# Altium PCB Main.PcbDoc
Units mil, origin at the board's own origin, x right, y up, seen from the top; angles counter-clockwise.
Board outline 2100 x 1125 mil, 3 copper layers (Top Layer, GND, Bottom Layer), stack 36.8 mil thick; 34 components, 21 nets, 135 pads, 0 vias.
Unrouted connection lines stored in the file: 80.
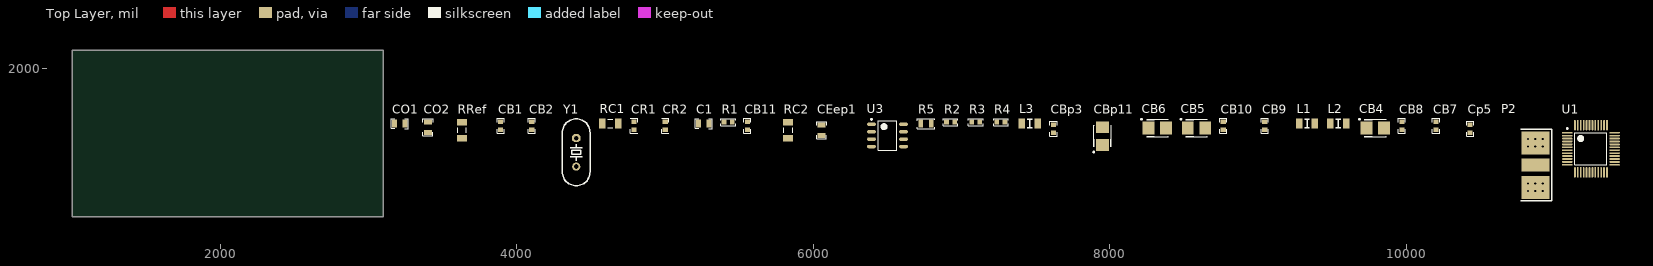
[diagram p0: Top Layer view]
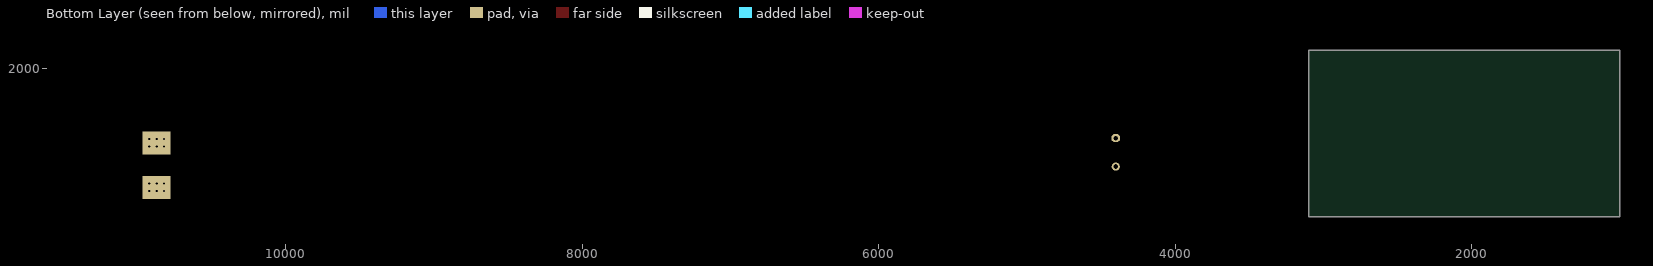
[diagram p1: Bottom Layer view, seen from below]
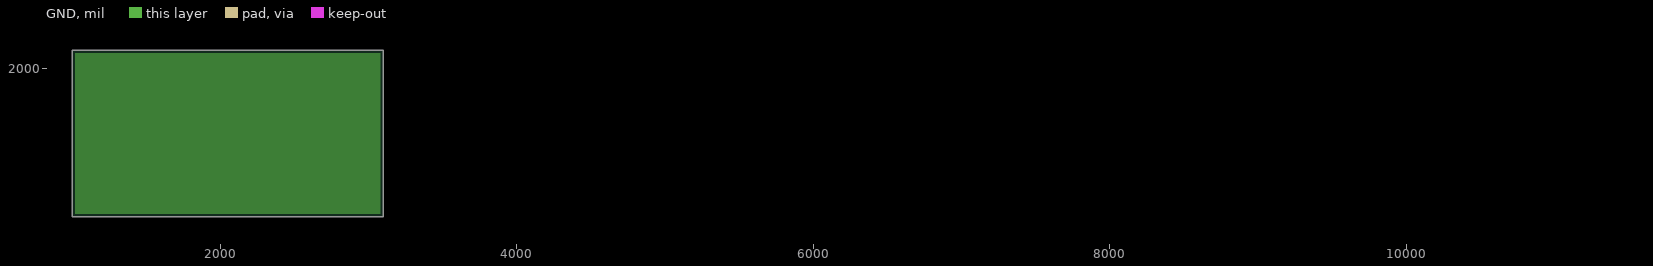
[diagram p2: GND, clearances drawn from the general rule]

## Layer stack, top to bottom
Top Layer: signal copper 1.4
Dielectric: core 20, FR-4, Dk 4.8
GND: plane copper 1.4, net GND
Dielectric: prepreg 12.6, FR-4, Dk 4.8
Bottom Layer: signal copper 1.4

## Board outline
1000,1000 1000,2125 3100,2125 3100,1000

## Design rules (kind name [scope] priority, off if disabled: settings)
Clearance "Clearance Poly" [InPolygon] p1: gap=8
Clearance [All] p2: gap=6
FlightTimeFalling [All] p1: maximum=1.000n
FlightTimeRising [All] p1: maximum=1.000n
HoleSize [All] p1: absolutevalues=TRUE maxlimit=500 minlimit=1 maxpercent=80.000 minpercent=20.000
HoleSize Testpoint [All] p2: absolutevalues=TRUE maxlimit=100 minlimit=1 maxpercent=80.000 minpercent=20.000
HoleSize TestPointUsage [All] p3: absolutevalues=TRUE maxlimit=100 minlimit=1 maxpercent=80.000 minpercent=20.000
MinimumAnnularRing [All] p1: minimumring=5
MinimumSolderMaskSliver [All] p1 off: minsoldermaskwidth=10
MinimumSolderMaskSliver SilkscreenOverComponentPads [All] p2 off: minsoldermaskwidth=10
OvershootFalling [All] p1: maximum=330.0m
OvershootRising [All] p1: maximum=330.0m
ParallelSegment [All] p1 off: limit=10000 gap=10
PlaneClearance [All] p1: clearance=20
PlaneConnect [All] p1: planeconnectstyle=Direct reliefexpansion=20 reliefentries=4 reliefconductorwidth=10 reliefairgap=10
PolygonConnect Heatsink [InNet('GND') vs InNet('GND')] p1: connectstyle=Direct reliefconductorwidth=10 reliefentries=4 polygonreliefangle="90 Angle" airgapwidth=10
PolygonConnect [All] p2: connectstyle=Relief reliefconductorwidth=10 reliefentries=4 polygonreliefangle="90 Angle" airgapwidth=10
RoomDefinition Main [InComponentClass('Main')] p1 off: confinementstyle=ConfineIn formatcopy=TRUE lockcomponents=FALSE outline 7045,1065 9835,1065 9835,1775 7045,1775
RoutingVias [All] p1: holewidth=15 width=30 viastyle="Through Hole" minholewidth=13 minwidth=25 maxholewidth=250 maxwidth=500
SignalStimulus [All] p1: kind=2 level=0 starttime=10.00n stoptime=60.00n periodtime=100.00n
SilkToSilkClearance [All] p1 off: silktosilkclearance=10
SolderMaskExpansion [All] p1: expansion=4
SupplyNets [All] p1: voltage=3.300
UndershootFalling [All] p1: maximum=330.0m
UndershootRising [All] p1: maximum=330.0m
Width Width_General [All] p1: maxlimit=250 minlimit=6 preferedwidth=10
Width "Width Differential Pair" [(InDifferentialPairClass('All Differential Pairs'))] p2: maxlimit=9.44 minlimit=1.94 preferedwidth=6.34 toplayer_minwidth=4.1 bottomlayer_maxwidth=5.3 bottomlayer_prefwidth=3.35 impedancedriven=TRUE minimp=80.000000 maximp=100.000000 favimp=90.000000
23 further rules are at their usual default settings.

## Components (designator, comment, footprint, x,y, rotation, side; value= is the part's Value field where it differs from the comment)
C1 "Cap Semi" 0805C 5260,1630 r0 top
CB1 "Cap Semi" 0603C 3890,1615 r90 top
CB2 "Cap Semi" 0603C 4100,1615 r90 top
CB4 "10 uF" B 9790,1600 r0 top
CB5 "10 uF" B 8585,1600 r0 top
CB6 "10 uF" B 8320,1600 r0 top
CB7 "Cap Semi" 0603C 10200,1615 r90 top
CB8 "Cap Semi" 0603C 9970,1615 r90 top
CB9 "Cap Semi" 0603C 9045,1615 r90 top
CB10 "Cap Semi" 0603C 8765,1615 r90 top
CB11 "Cap Semi" 0603C 5555,1615 r90 top
CBp3 "Cap Semi" 0603C 7620,1595 r90 top
CBp11 "10 uF" B 7950,1545 r90 top
CEep1 "Cap Semi" 0805C 6055,1585 r90 top
CO1 "Cap Semi" 0805C 3210,1630 r0 top
CO2 "Cap Semi" 0805C 3400,1605 r90 top
Cp5 "Cap Semi" 0603C 10430,1595 r90 top
CR1 "PGB1010603" 0603PG 4790,1615 r90 top
CR2 "PGB1010603" 0603PG 5000,1615 r90 top
L1 "Inductor" 1206F 9330,1630 r0 top
L2 "Inductor" 1206F 9540,1630 r0 top
L3 "Inductor" 1206F 7460,1630 r0 top
P2 "COAX-M" "SMA Jack - PCB Edge - MultiSize" 10770,1350 r0 top
R1 "Res Semi" 0603R 5425,1640 r0 top
R2 "Res Semi" 0603R 6925,1640 r0 top
R3 "Res Semi" 0603R 7095,1640 r0 top
R4 "Res Semi" 0603R 7265,1640 r0 top
R5 "Res Semi" 0805r 6760,1630 r0 top
RC1 "Res Semi" 1206R 4630,1630 r0 top
RC2 "Res Semi" 1206R 5830,1585 r90 top
RRef "Res Semi" 1206R 3630,1585 r90 top
U1 "FT232HL" TSQFP50P900X900-48N 11245,1460 r0 top
U3 "93C(4/5/6)6" SOIC127P600-8CN 6500,1550 r0 top
Y1 "12 Mhz Parallel Resonant" HC-49 4400,1340 r90 top

## Footprints (in the part's own frame and the unit in brackets; to place one, negate y for a bottom-side part, rotate by r counter-clockwise, add the part's x,y. Pads: shape width x height; smd on the part's side, far side on the other; paste and mask are expansions set on the pad)
0603C [mm] "0603 Size Capacitor"
  rect 0.8x0.9 smd: 1(-0.7,0) 2(0.7,0)
  silkscreen extent -1.27,-0.61 1.27,0.61, body extent -0.87,-0.48 0.87,0.48, height 1.3
0603PG [mm]
  rect 0.8x0.9 smd: 1(-0.7,0) 2(0.7,0)
  silkscreen extent -1.27,-0.61 1.27,0.61, body extent -0.87,-0.48 0.87,0.48, height 1.3
0603R [mm]
  rect 0.8x0.9 smd: 1(-0.7,0) 2(0.7,0)
  silkscreen extent -1.27,-0.61 1.27,0.61, body extent -0.87,-0.48 0.87,0.48, height 1.3
0805C [mm]
  rect 0.8x1.4 smd: 1(-0.9,0) 2(0.9,0)
  silkscreen extent -1.45,-0.86 1.47,0.86, body extent -1.1,-0.72 1.1,0.72, height 1.4
0805r [mm] "0805 Chip Resistor"
  rect 0.8x1.4 smd: 1(-0.9,0) 2(0.9,0)
  silkscreen extent -1.47,-0.86 1.47,0.86, body extent -1.1,-0.72 1.1,0.72, height 1.4
1206F [mm] "1206 Chip Ferrite Bead"
  rect 1.1x1.7 smd: 1(-1.35,0) 2(1.35,0)
  silkscreen extent -0.4,-0.75 0.4,0.75, body extent -1.7,-0.9 1.7,0.9, height 1.3
1206R [mm] "1206 Chip Resistor"
  rect 1.1x1.7 smd: 1(-1.35,0) 2(1.35,0)
  silkscreen extent -0.4,-0.75 0.4,0.75, body extent -1.7,-0.9 1.7,0.9, height 1.3
B [mm] "Capacitor, SM Tantalum; Body 3.5 x 2.8 mm (LxW typ)"
  rect 2x2.2 smd: 1(-1.5,0) 2(1.5,0)
  silkscreen extent -2.82,-1.5 1.85,1.62
HC-49 [mm] "HC-49 Quartz Crystal"
  oct 1.4x1.4 hole 0.8: 1(4.877,0)
  round 1.4 hole 0.8: 2(0,0)
  silkscreen extent -3.29,-2.38 8.17,2.38, body extent -3.3,-2.39 8.18,2.39, height 13.46
"SMA Jack - PCB Edge - MultiSize" [mil] "SMA Jack - PCB Edge - MultiSize"
  rect 190x90 smd: 1(100,0)
  round 30 hole 15: 2(50,-175) 2(50,-125) 2(50,125) 2(50,175) 2(100,-175) 2(100,-125) 2(100,125) 2(100,175) 2(150,-175) 2(150,-125) 2(150,125) 2(150,175)
  rect 190x155 smd: 2(100,-150) 2(100,150)
  rect 190x155 smd far side: 2(100,-150) 2(100,150)
  silkscreen extent 0,-240 210,240, body extent -5,-245 215,245, height 180
SOIC127P600-8CN [mm] "SOIC, 8-Leads, Body 4.9x3.9mm, Pitch 1.27mm, IPC Medium Density"
  oval 1.5x0.6 smd: 1(-2.75,1.905) 2(-2.75,0.635) 3(-2.75,-0.635) 4(-2.75,-1.905) 5(2.75,-1.905) 6(2.75,-0.635) 7(2.75,0.635) 8(2.75,1.905)
  silkscreen extent -2.87,-2.5 1.6,2.88, body extent -3.01,-2.5 3.01,2.5, height 1.75
TSQFP50P900X900-48N [mm] "Thin QFP, 48-Leads, Body 7x7mm, Pitch 0.5mm, IPC Medium Density"
  oval 1.8x0.3 smd: 1(-4.05,2.75) 2(-4.05,2.25) 3(-4.05,1.75) 4(-4.05,1.25) 5(-4.05,0.75) 6(-4.05,0.25) 7(-4.05,-0.25) 8(-4.05,-0.75) 9(-4.05,-1.25) 10(-4.05,-1.75) 11(-4.05,-2.25) 12(-4.05,-2.75) 25(4.05,-2.75) 26(4.05,-2.25) 27(4.05,-1.75) 28(4.05,-1.25) 29(4.05,-0.75) 30(4.05,-0.25) 31(4.05,0.25) 32(4.05,0.75) 33(4.05,1.25) 34(4.05,1.75) 35(4.05,2.25) 36(4.05,2.75)
  oval 0.3x1.8 smd: 13(-2.75,-4.05) 14(-2.25,-4.05) 15(-1.75,-4.05) 16(-1.25,-4.05) 17(-0.75,-4.05) 18(-0.25,-4.05) 19(0.25,-4.05) 20(0.75,-4.05) 21(1.25,-4.05) 22(1.75,-4.05) 23(2.25,-4.05) 24(2.75,-4.05) 37(2.75,4.05) 38(2.25,4.05) 39(1.75,4.05) 40(1.25,4.05) 41(0.75,4.05) 42(0.25,4.05) 43(-0.25,4.05) 44(-0.75,4.05) 45(-1.25,4.05) 46(-1.75,4.05) 47(-2.25,4.05) 48(-2.75,4.05)
  silkscreen extent -4.17,-2.75 2.75,3.57, body extent -3.5,-3.5 3.5,3.5, height 1.6

## Part data
C1 CB1 CB2 CB7 CB8 CB9 CB10 CB11 CBp3 CEep1 CO1 CO2 Cp5: "Capacitor (Semiconductor SIM Model)"
CB4 CB5 CB6 CBp11: library part "100 uf SMT Panasonic Cap"
CR1 CR2: "PulseGuard® Lead-Free 0603 Surface Mount Polymeric ESD Suppressors"
P2: "RF Coaxial PCB Connector, MMCX; Thru-Hole, Vertical Mount Plug,  50 Ohm Impedance"
R1 R2 R3 R4 R5 RC1 RC2 RRef: "Semiconductor Resistor"
U1: "Hi-Speed Single Channel USB UART/FIFO IC"
U3: "1/2/4K 3-Wire Serial EEPROM"
Y1: library part ECS-10-13-1, "Crystal Oscillator"

## Nets (pads, with @x,y where several pads share a name; then routed paths per layer and width w, separated by ;. In a path a pad name is that pad's centre, name@x,y a point inside that pad or via, vN(x,y) a via of type N, cw(c..) or ccw(c..) an arc to the next point about the centre after c; other vN are vias at no path point)
3V3: CB4.1 CB7.1 CB8.1 Cp5.1 L1.2 L2.2 R5.1 U1.12 U1.24 U1.39 U1.46
DV33: CEep1.1 R2.1 R3.1 R4.1 U3.6 U3.8
GND: C1.1 CB1.2 CB2.2 CB4.2 CB5.2 CB6.2 CB7.2 CB8.2 CB9.2 CB10.2 CB11.2 CBp3.2 CBp11.2 CEep1.2 CO1.2 CO2.2 Cp5.2 CR1.2 CR2.2 P2.2 RC1.1 RC2.1 RRef.1 U1.4 U1.9 U1.10 U1.11 U1.22 U1.23 U1.35 U1.36 U1.41 U1.42 U1.47 U1.48 U3.5
NetC1_2: C1.2 L3.1
NetCB1_1: CB1.1 U1.38
NetCB2_1: CB2.1 U1.37
NetCB5_1: CB5.1 CB9.1 L1.1 U1.8
NetCB6_1: CB6.1 CB10.1 L2.1 U1.3
NetCB11_1: CB11.1 R5.2 U1.34
NetCNU_2: CR1.1 U1.6
NetCNU_3: CR2.1 U1.7
NetCNU_5: RC1.2
NetCNU_6: RC2.2
NetCO1_1: CO1.1 U1.2 Y1.2
NetCO2_1: CO2.1 U1.1 Y1.1
NetR1_1: R1.1 R4.2 U3.4
NetR1_2: R1.2 U1.43 U3.3
NetR2_2: R2.2 U1.45 U3.1
NetR3_2: R3.2 U1.44 U3.2
NetRRef_2: RRef.2 U1.5
USB-VDD: CBp3.1 CBp11.1 L3.2 U1.40
pads on no net: P2.1 U1.13 U1.14 U1.15 U1.16 U1.17 U1.18 U1.19 U1.20 U1.21 U1.25 U1.26 U1.27 U1.28 U1.29 U1.30 U1.31 U1.32 U1.33 U3.7

## Polygon pours and split planes (outlines as drawn)
GND on GND (split plane): 3079.9,1020.1 1020.1,1020.1 1020.1,2104.9 3079.9,2104.9

## Text inside footprints (layer, text, board x,y; h text height)
P2: Mechanical 1 "Board Edge" at 10700,1080 h60 r90